# Altium PCB switch_v4.PcbDoc
Units mm, origin at the board's own origin, x right, y up, seen from the top; angles counter-clockwise.
Board outline 96 x 81 mm, 4 copper layers (Top Layer, Signal Layer 1, Signal Layer 2, Bottom Layer), stack 1.47 mm thick; 127 components, 94 nets, 434 pads, 936 vias.
Unrouted connection lines stored in the file: 1.
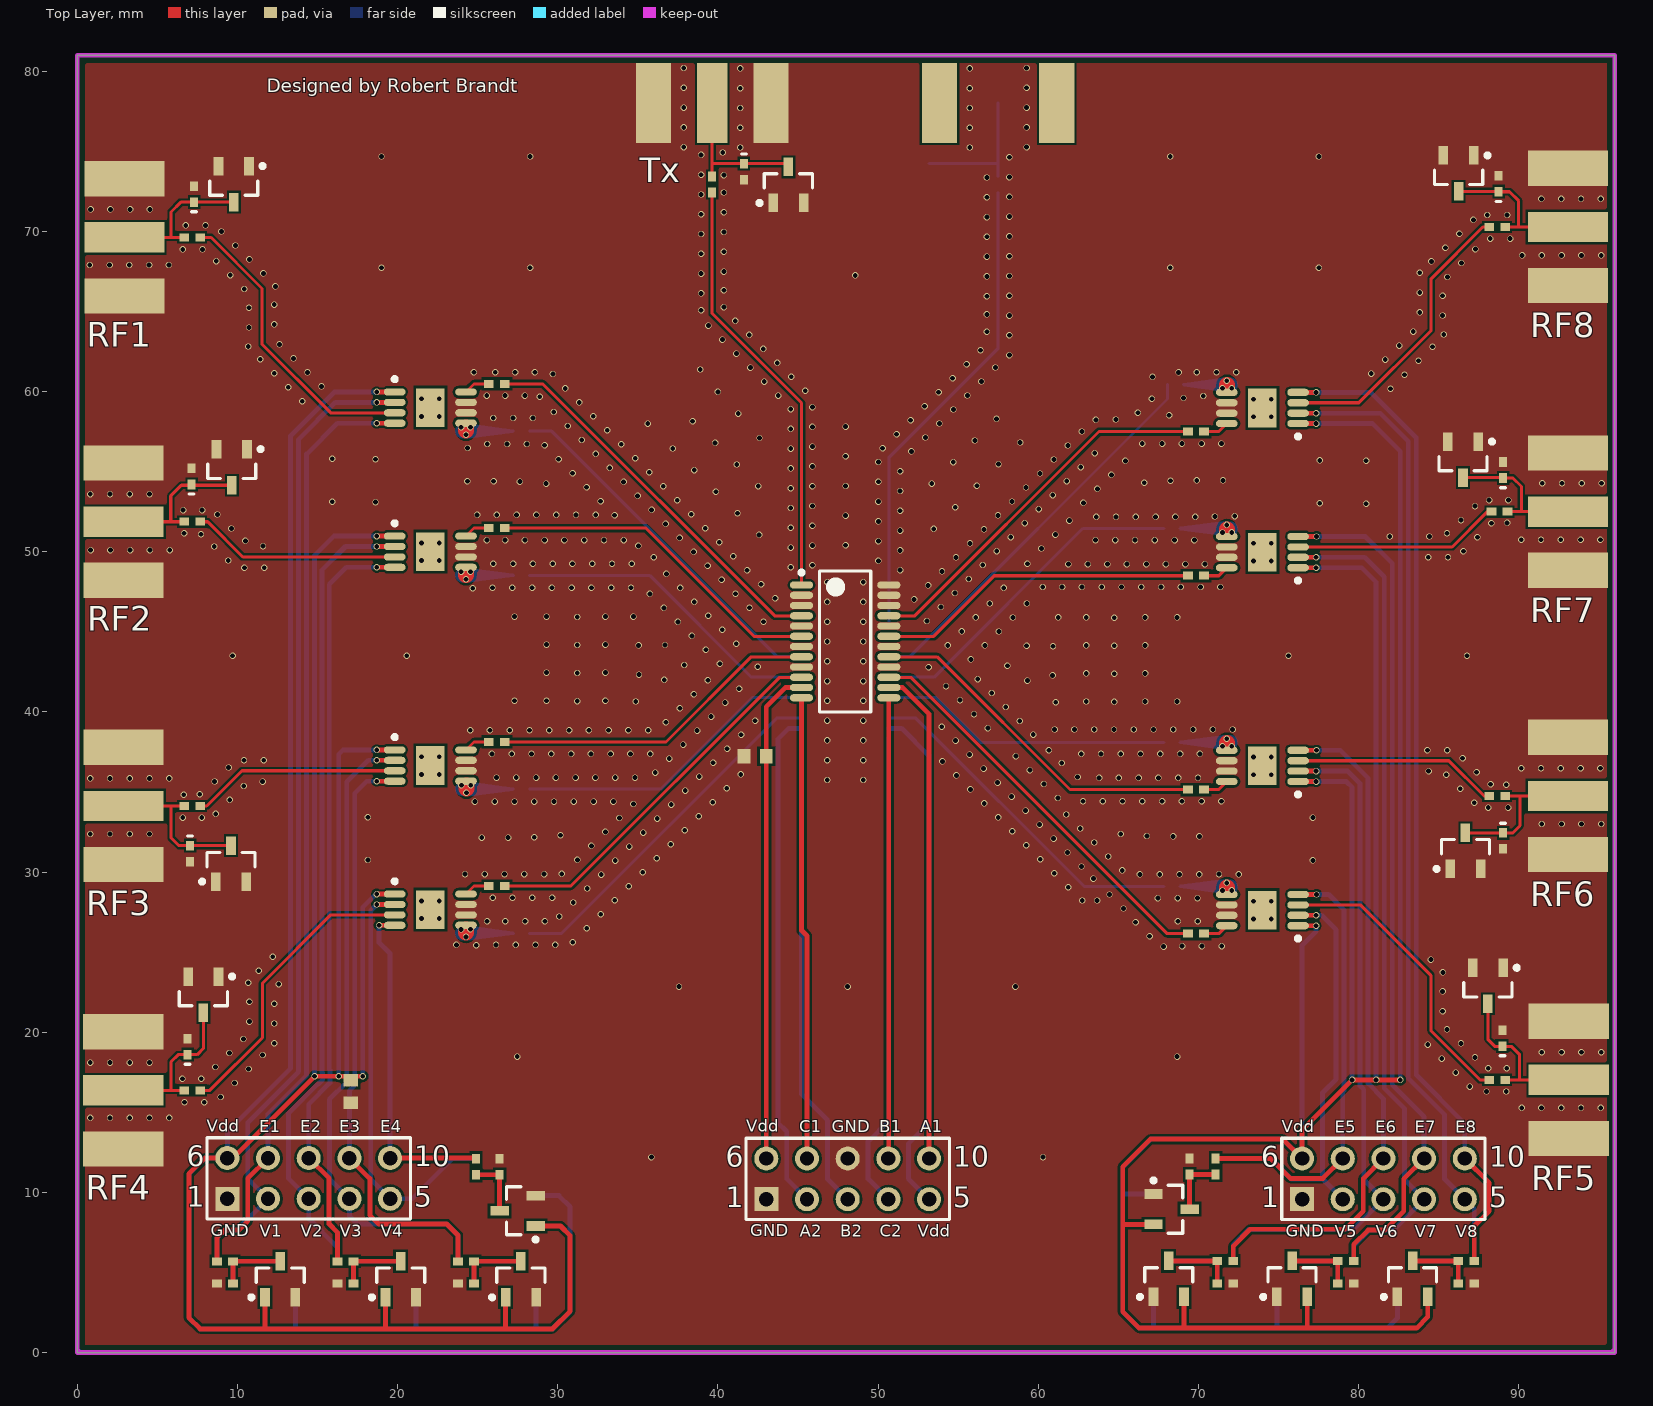
[diagram p0: Top Layer view]
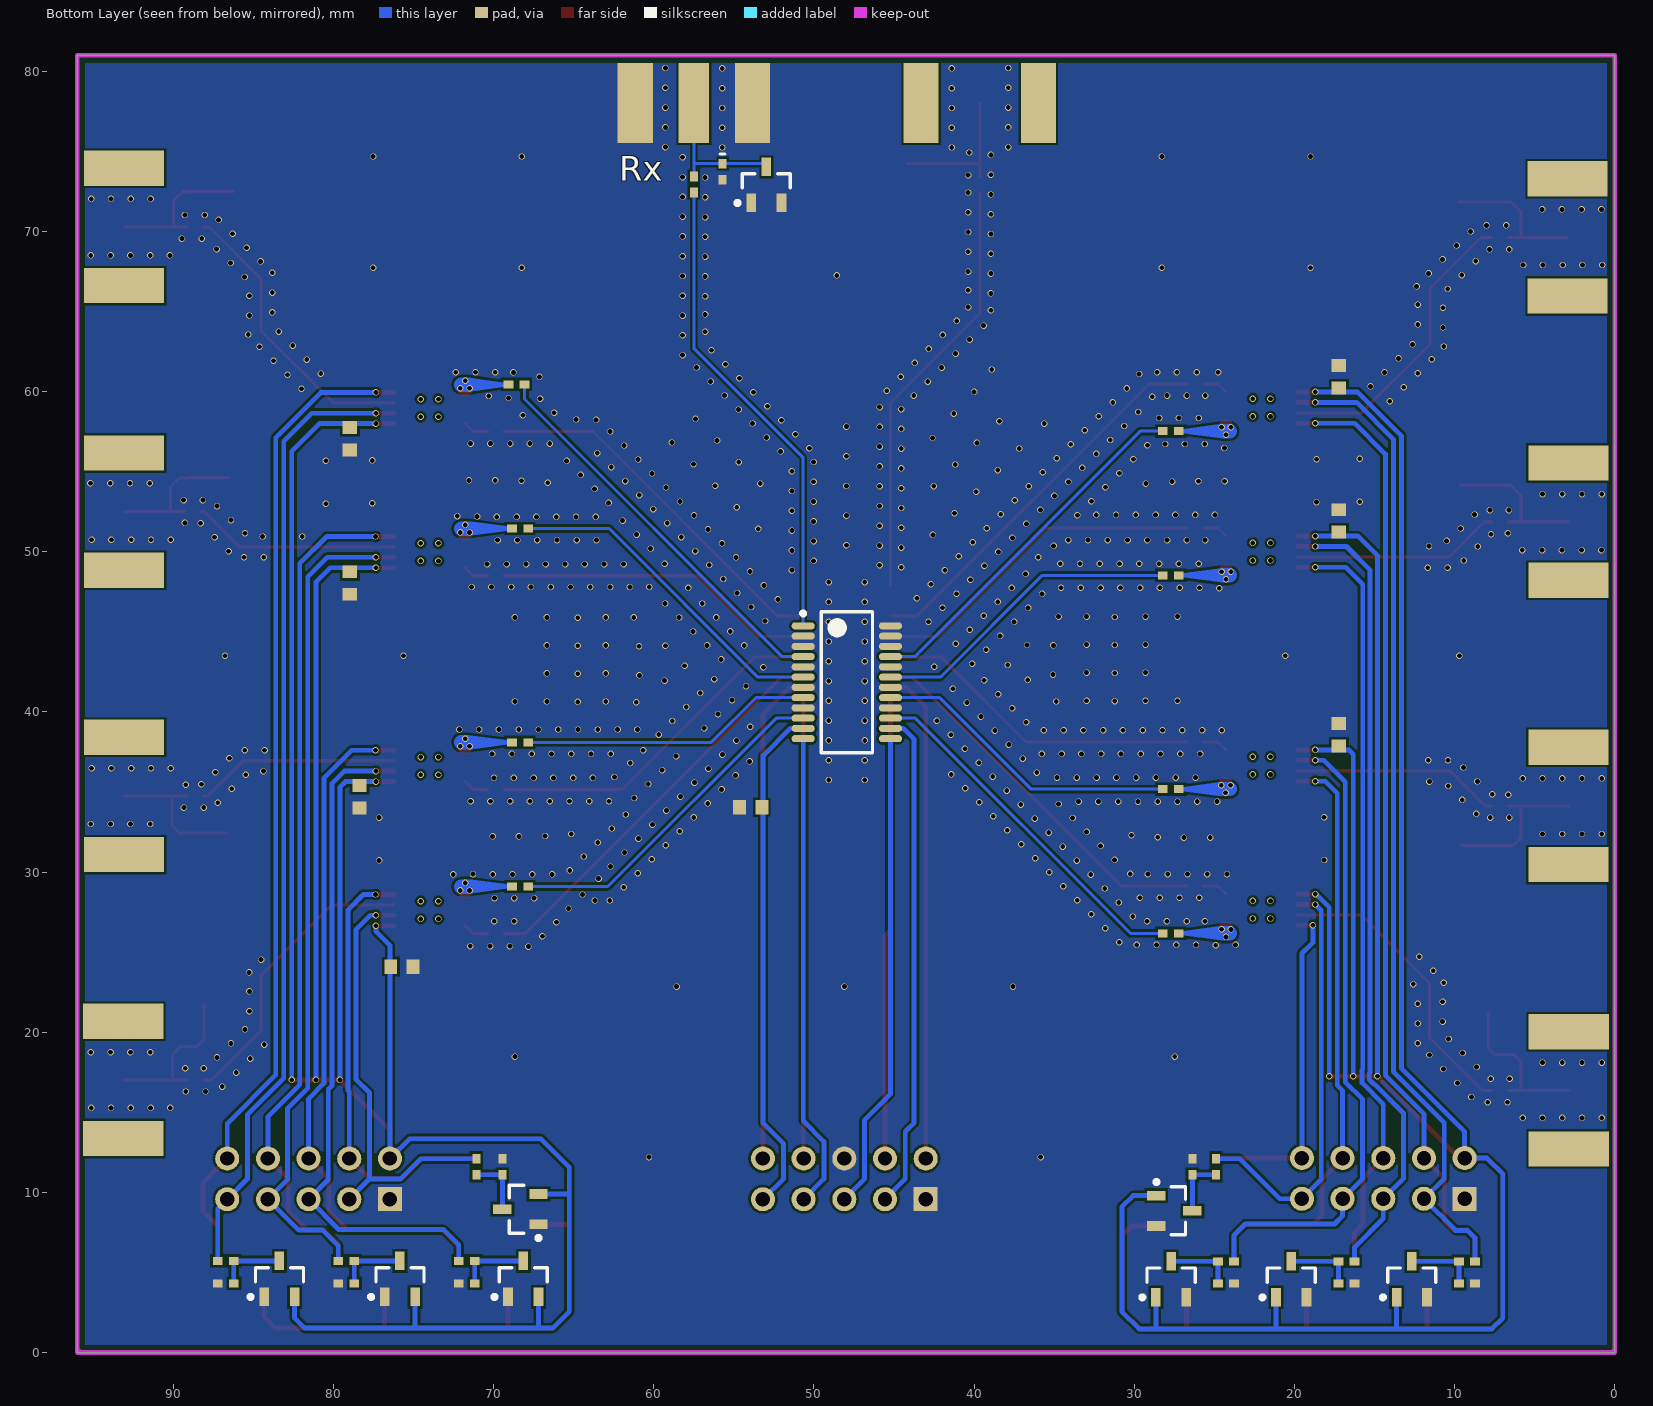
[diagram p1: Bottom Layer view, seen from below]
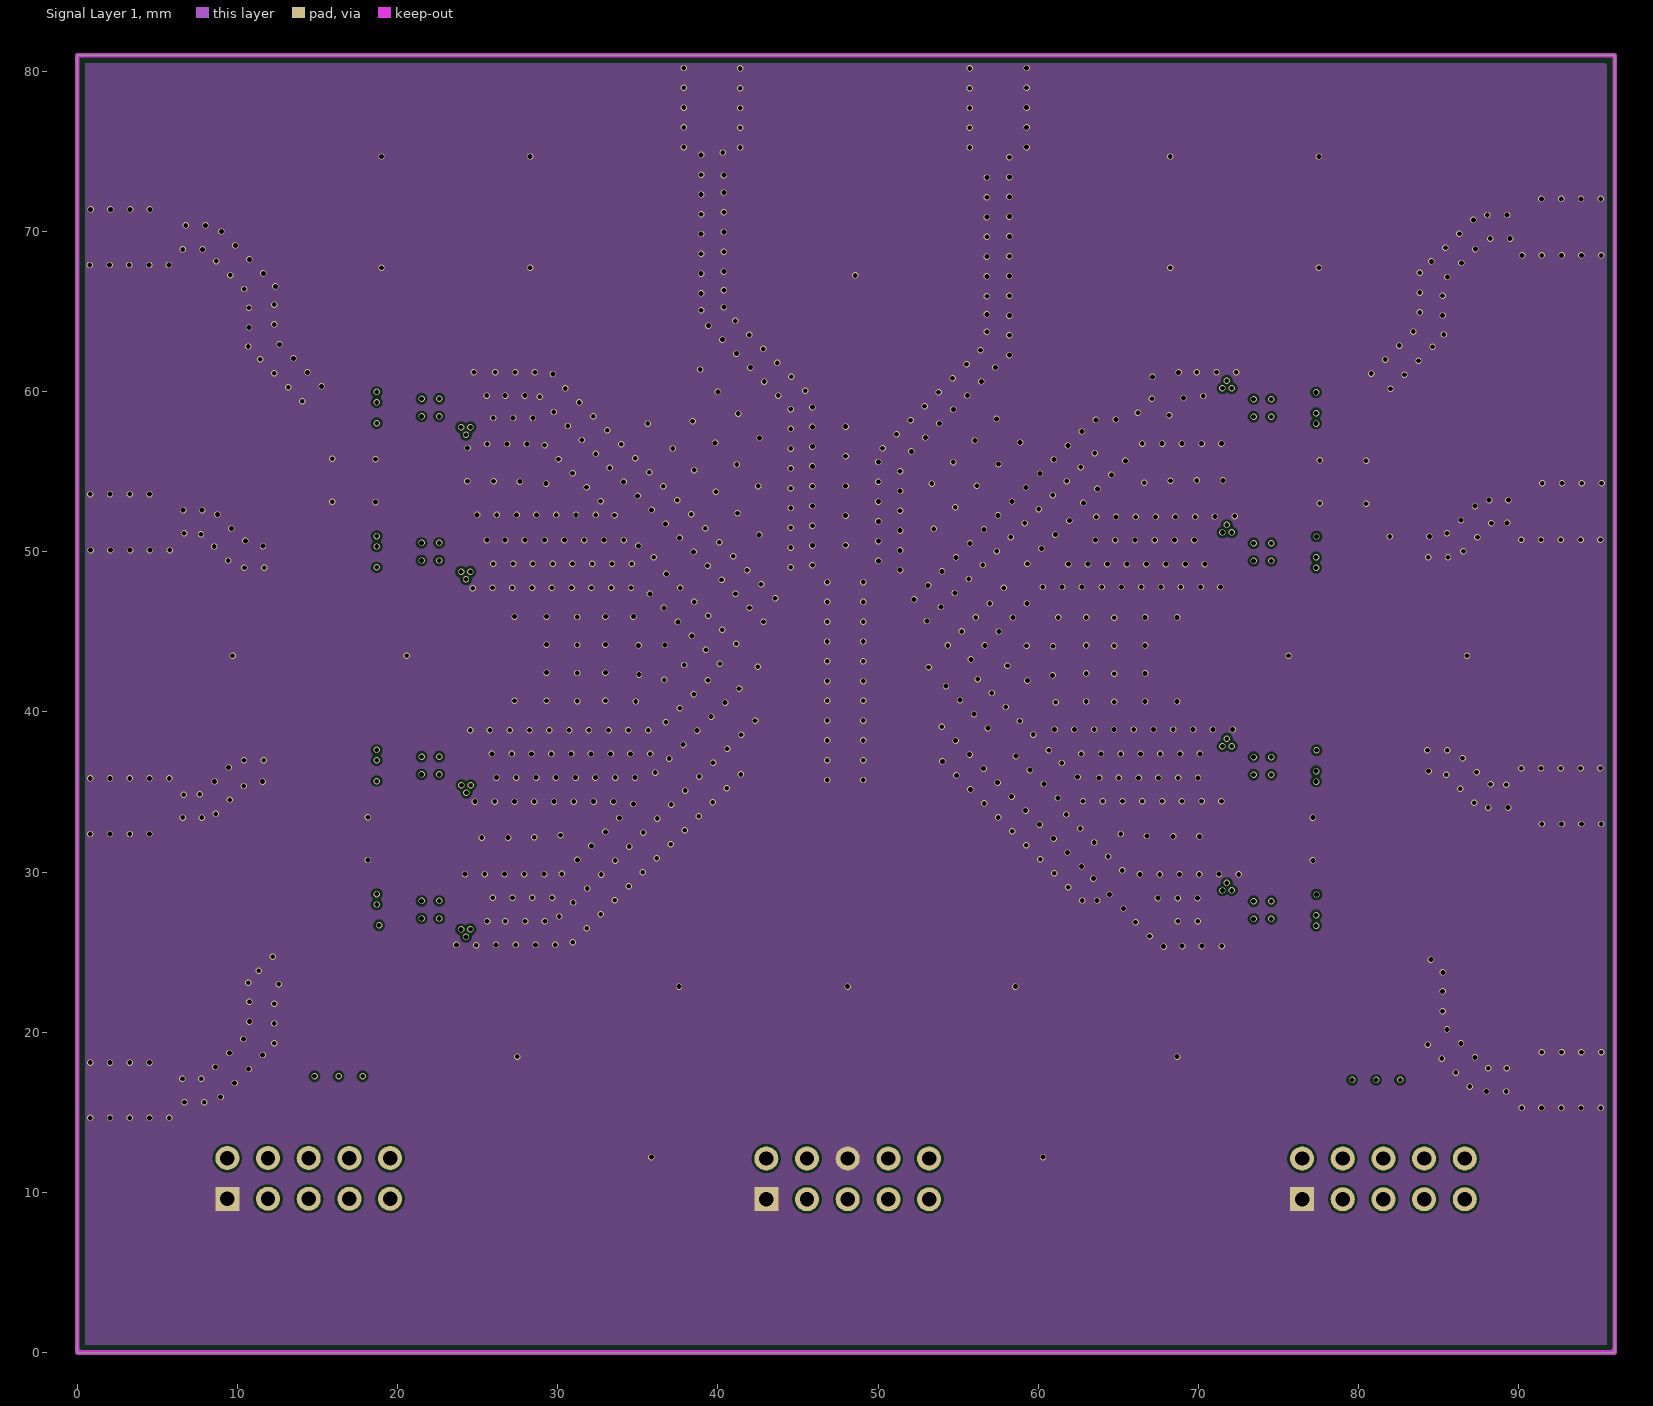
[diagram p2: Signal Layer 1]
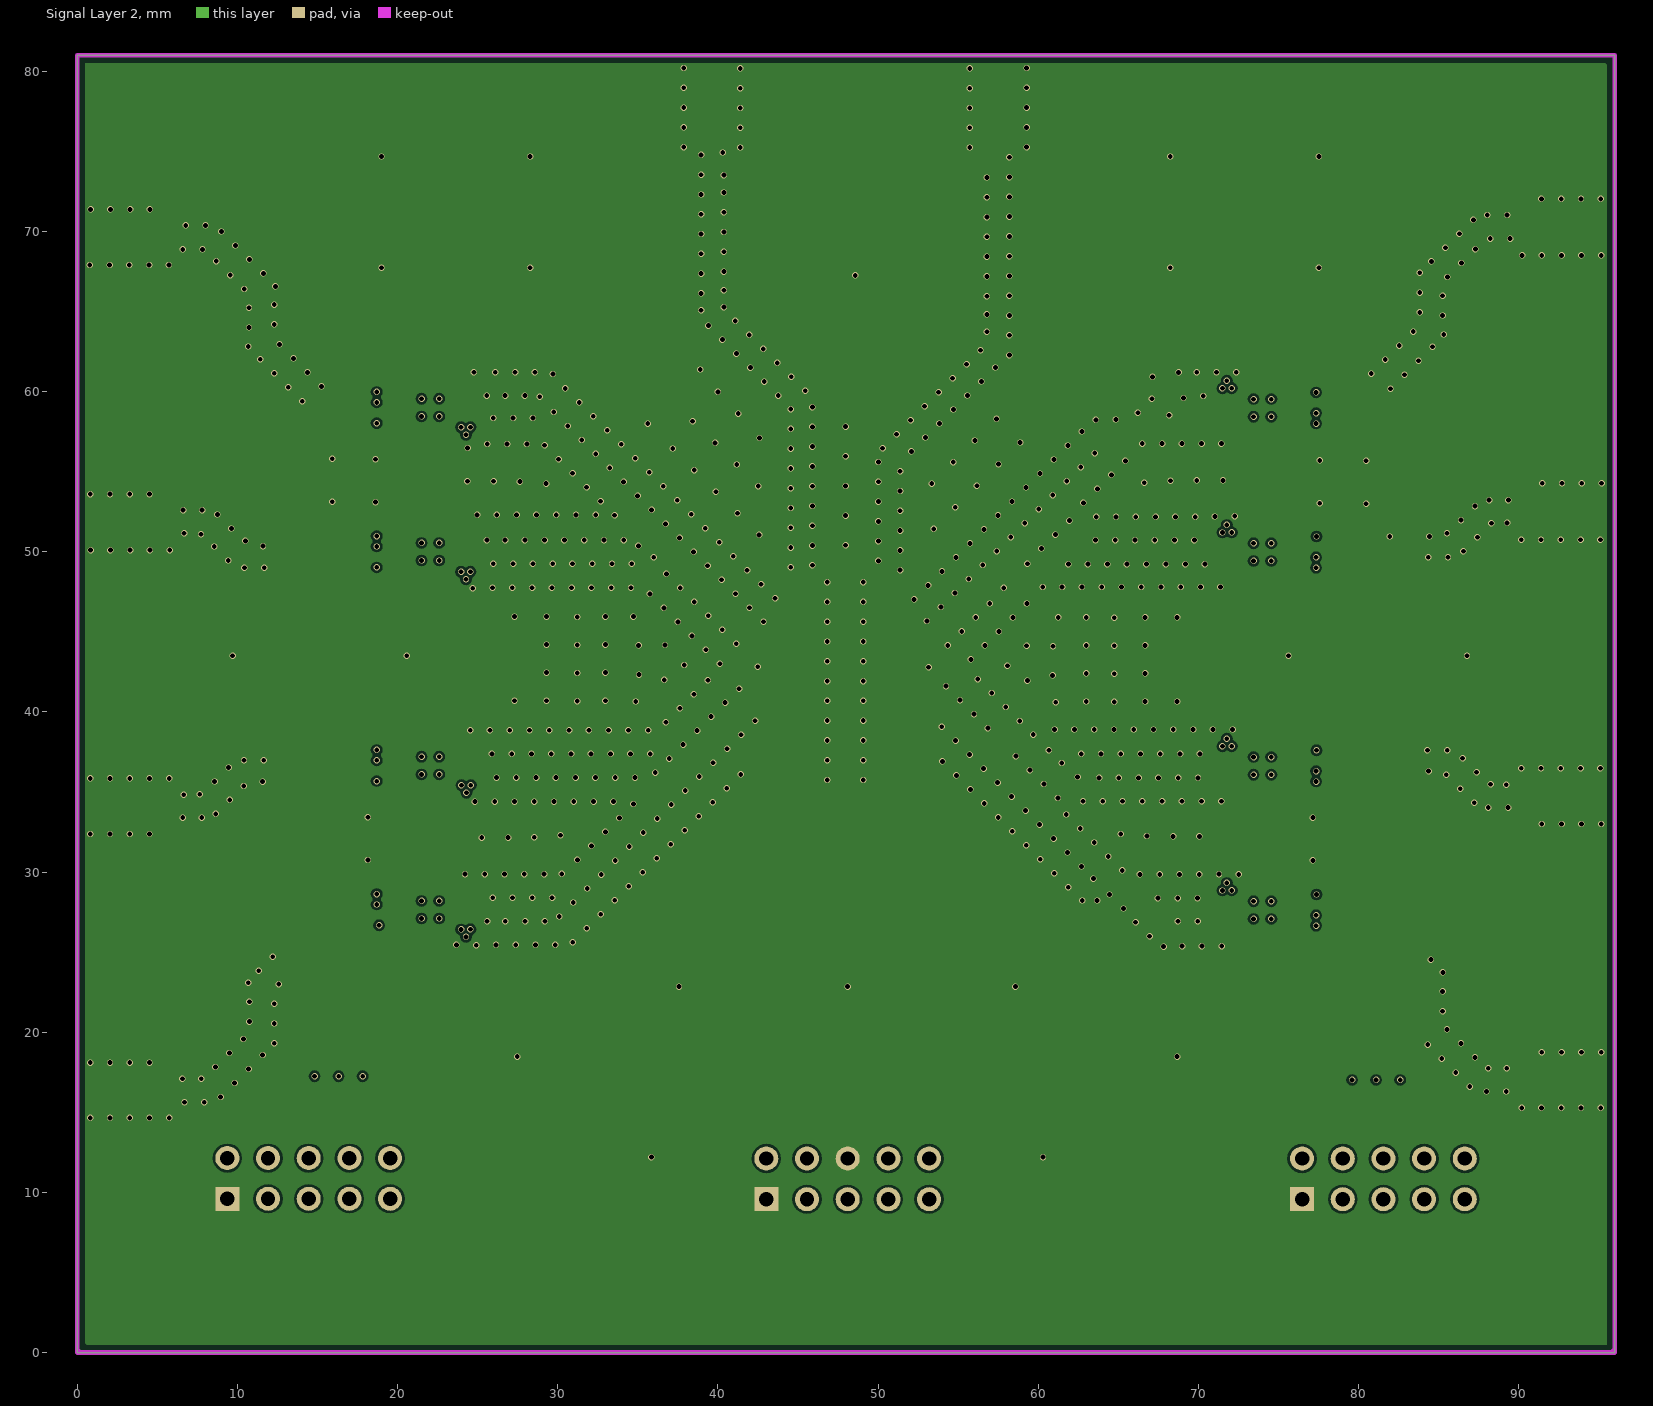
[diagram p3: Signal Layer 2]

## Layer stack, top to bottom
Top Solder: solder mask 0.0102, Solder Resist, Dk 3.5
Top Layer: signal copper 0.0356
Dielectric1: core 0.6, FR-4, Dk 4.2
Signal Layer 1: signal copper 0.036
Prepreg: prepreg 0.127, FR-4, Dk 4.2
Signal Layer 2: signal copper 0.036
Dielectric 3: core 0.6, FR-4, Dk 4.2
Bottom Layer: signal copper 0.0356
Bottom Solder: solder mask 0.0102, Solder Resist, Dk 3.5

## Board outline
0,0 0,81 96,81 96,0

## Design rules (kind name [scope] priority, off if disabled: settings)
Clearance [All] p1: gap=0.153
FabricationTestPointUsage TestPointUsage [All] p1: valid=0 allowmultiple=FALSE
FabricationTestpoint Testpoint [All] p1: side=3 testpointundercomponent=TRUE minsize=1.016 maxsize=2.54 preferedsize=1.524 minholesize=0 maxholesize=1.016 preferedholesize=0.813 testpointgrid=0.025 allowsidetop=TRUE allowsidebottom=TRUE usegrid=TRUE gridtolerance=0
PlaneClearance [All] p1: clearance=0.2
PolygonConnect [All] p1: connectstyle=Direct reliefconductorwidth=0.1 reliefentries=4 polygonreliefangle="90 Angle" airgapwidth=0.1
RoomDefinition switch_v2 [InNet() And OnLayer()] p1: confinementstyle=ConfineIn formatcopy=TRUE lockcomponents=FALSE outline -30.433,85.65 128.675,85.65 128.675,92.725 -30.433,92.725
RoutingVias [All] p1: holewidth=0.2 width=0.3 viastyle="Through Hole" minholewidth=0.2 minwidth=0.3 maxholewidth=0.2 maxwidth=0.3
SilkToSolderMaskClearance SilkscreenOverComponentPads [IsPad] p1: minsilkscreentomaskgap=0.254 clearancetoexposedcopper=TRUE
SolderMaskExpansion [All] p1: expansion=0.102
UnpouredPolygon [All] p1: allowunpoured=FALSE
Width [All] p1: maxlimit=0.19 minlimit=0.19 preferedwidth=0.19
25 further rules are at their usual default settings.

## Classes and differential pairs
component class switch_v2: RF1 RF2 RF3 RF4 RF5 RF6 RF7 RF8

## Components (designator, comment, footprint, x,y, rotation, side; value= is the part's Value field where it differs from the comment)
C1_A "Cap Semi" 0402 26.2,60.475 r0 top
C1_B "Cap Semi" 0402 68.575,60.45 r0 bottom
C1_C "Cap Semi" 0402 7.175,69.622 r0 top
C1_Vdd "Cap Semi" 1608[0603] 42.325,37.225 r0 top
C2_A "Cap Semi" 0402 26.2,51.475 r0 top
C2_B "Cap Semi" 0402 68.35,51.45 r0 bottom
C2_C "Cap Semi" 0402 7.175,51.872 r0 top
C2_Vdd "Cap Semi" 1608[0603] 53.95,34.05 r0 bottom
C3_A "Cap Semi" 0402 26.2,38.125 r0 top
C3_B "Cap Semi" 0402 68.35,38.1 r0 bottom
C3_C "Cap Semi" 0402 7.175,34.122 r0 top
C4_A "Cap Semi" 0402 26.2,29.125 r0 top
C4_B "Cap Semi" 0402 68.35,29.1 r0 bottom
C4_C "Cap Semi" 0402 7.175,16.372 r0 top
C5_A "Cap Semi" 0402 69.85,26.15 r0 top
C5_B "Cap Semi" 0402 27.725,26.175 r0 bottom
C5_C "Cap Semi" 0402 88.65,17.022 r0 top
C6_A "Cap Semi" 0402 69.85,35.15 r0 top
C6_B "Cap Semi" 0402 27.725,35.175 r0 bottom
C6_C "Cap Semi" 0402 88.65,34.747 r0 top
C7_A "Cap Semi" 0402 69.85,48.5 r0 top
C7_B "Cap Semi" 0402 27.725,48.525 r0 bottom
C7_C "Cap Semi" 0402 88.8,52.497 r0 top
C8_A "Cap Semi" 0402 69.85,57.5 r0 top
C8_B "Cap Semi" 0402 27.725,57.525 r0 bottom
C8_C "Cap Semi" 0402 88.65,70.272 r0 top
C_SP8T_1 "Cap Semi" 0402 39.647,72.925 r90 top
C_SP8T_2 "Cap Semi" 0402 57.5,72.925 r270 bottom
CA1_Vdd "Cap Semi" 1608[0603] 17.225,60.925 r90 bottom
CA2_Vdd "Cap Semi" 1608[0603] 17.225,51.925 r90 bottom
CA3_Vdd "Cap Semi" 1608[0603] 17.225,38.575 r90 bottom
CA4_Vdd "Cap Semi" 1608[0603] 17.075,16.3 r270 top
CA5_Vdd "Cap Semi" 1608[0603] 75.725,24.1 r0 bottom
CA6_Vdd "Cap Semi" 1608[0603] 78.375,34.7 r90 bottom
CA7_Vdd "Cap Semi" 1608[0603] 78.975,48.05 r90 bottom
CA8_Vdd "Cap Semi" 1608[0603] 78.975,57.05 r90 bottom
D1_EN "Diode" SOT-23_N 52.975,72.9 r90 bottom
D1_EN "Diode" SOT-23_N 44.4,72.9 r90 top
D1_EN "Diode" SOT-23_N 86.25,73.625 r270 top
D1_EN "Diode" SOT-23_N 86.525,55.75 r270 top
D1_EN "Diode" SOT-23_N 86.675,31.325 r90 top
D1_EN "Diode" SOT-23_N 88.075,22.9 r270 top
D1_EN "Diode" SOT-23_N 7.875,22.35 r270 top
D1_EN "Diode" SOT-23_N 9.6,30.525 r90 top
D1_EN "Diode" SOT-23_N 9.65,55.275 r270 top
D1_EN "Diode" SOT-23_N 12.675,4.575 r90 top
D1_EN "Diode" SOT-23_N 9.775,72.95 r270 top
D1_Vctl "Diode" SOT-23_N 12.675,4.575 r90 bottom
D2_EN "Diode" SOT-23_N 20.2,4.575 r90 top
D2_Vctl "Diode" SOT-23_N 20.2,4.575 r90 bottom
D3_EN "Diode" SOT-23_N 27.7,4.575 r90 top
D3_Vctl "Diode" SOT-23_N 27.7,4.575 r90 bottom
D4_EN "Diode" SOT-23_N 27.5,8.85 r180 top
D4_Vctl "Diode" SOT-23_N 27.5,8.85 r180 bottom
D5_EN "Diode" SOT-23_N 68.325,8.95 r0 top
D5_Vctl "Diode" SOT-23_N 68.325,8.95 r0 bottom
D6_EN "Diode" SOT-23_N 68.15,4.6 r90 top
D6_Vctl "Diode" SOT-23_N 68.15,4.6 r90 bottom
D7_EN "Diode" SOT-23_N 75.85,4.6 r90 top
D7_Vctl "Diode" SOT-23_N 75.85,4.6 r90 bottom
D8_EN "Diode" SOT-23_N 83.375,4.6 r90 top
D8_Vctl "Diode" SOT-23_N 83.375,4.6 r90 bottom
"R1_EN 133K" "" 0402 9.225,4.3 r0 top
"R1_EN 500" "" 0402 9.225,5.7 r180 top
"R1_Vctl 133K" "" 0402 9.225,4.3 r0 bottom
"R1_Vctl 500" "" 0402 9.225,5.7 r180 bottom
"R2 EN 133K" "" 0402 16.75,4.3 r0 top
"R2 EN 500" "" 0402 16.75,5.7 r180 top
"R2_Vctl 133K" "" 0402 16.75,4.3 r0 bottom
"R2_Vctl 500" "" 0402 16.75,5.7 r180 bottom
"R3 EN 133K" "" 0402 24.275,4.3 r0 top
"R3 EN 500" "" 0402 24.275,5.7 r180 top
"R3 Vctl 133K" "" 0402 24.275,4.3 r0 bottom
"R3 Vctl 500" "" 0402 24.275,5.7 r180 bottom
"R4 EN 133K" "" 0402 26.375,11.6 r270 top
"R4 EN 500" "" 0402 24.9,11.6 r90 top
"R4 Vctl 133K" "" 0402 26.375,11.6 r270 bottom
"R4 Vctl 500" "" 0402 24.9,11.6 r90 bottom
"R5 EN 133K" "" 0402 69.45,11.615 r90 top
"R5 EN 500" "" 0402 71.075,11.615 r270 top
"R5 Vctl 133K" "" 0402 69.45,11.6 r90 bottom
"R5 Vctl 500" "" 0402 71.075,11.6 r270 bottom
"R6 EN 133K" "" 0402 71.675,4.325 r0 top
"R6 EN 500" "" 0402 71.675,5.725 r180 top
"R6 Vctl 133K" "" 0402 71.675,4.325 r0 bottom
"R6 Vctl 500" "" 0402 71.675,5.725 r180 bottom
"R7 EN 133K" "" 0402 79.2,4.325 r0 top
"R7 EN 500" "" 0402 79.2,5.725 r180 top
"R7 Vctl 133K" "" 0402 79.2,4.325 r0 bottom
"R7 Vctl 500" "" 0402 79.2,5.725 r180 bottom
"R8 1_EN 133K" "" 0402 86.725,4.325 r0 top
"R8 EN 500" "" 0402 86.725,5.725 r180 top
"R8 Vctl 133K" "" 0402 86.725,4.325 r0 bottom
"R8 Vctl 500" "" 0402 86.725,5.725 r180 bottom
RF1 "J502-ND" J502-ND 2.952,69.625 r90 top
RF2 "J502-ND" J502-ND 2.902,51.875 r90 top
RF3 "J502-ND" J502-ND 2.902,34.125 r90 top
RF4 "J502-ND" J502-ND 2.875,16.375 r90 top
RF5 "J502-ND" J502-ND 93.123,17.025 r90 top
RF6 "J502-ND" J502-ND 93.073,34.75 r90 top
RF7 "J502-ND" J502-ND 93.073,52.5 r90 top
RF8 "J502-ND" J502-ND 93.073,70.275 r90 top
Rx "J502-ND" J502-ND 57.5,78.024 r0 bottom (schematic designator RFc2)
"SP8T control" "Header 5X2A" HDR2X5_CEN 43.025,9.575 r0 top
SP8T_1 "SP8T" SP8T 47.95,44.4 r0 top
SP8T_2 "SP8T" SP8T 47.95,41.85 r180 bottom
"SPDT control 1" "Header 5X2A" HDR2X5_CEN 9.375,9.6 r0 top
"SPDT control 2" "Header 5X2A" HDR2X5_CEN 76.475,9.575 r0 top
SPDT_1 "SPDT" SPDT 22.05,59 r0 top
SPDT_2 "SPDT" SPDT 22.05,50 r0 top
SPDT_3 "SPDT" SPDT 22.05,36.65 r0 top
SPDT_4 "SPDT" SPDT 22.05,27.65 r0 top
SPDT_5 "SPDT" SPDT 74,27.625 r180 top
SPDT_6 "SPDT" SPDT 74,36.625 r180 top
SPDT_7 "SPDT" SPDT 74,49.975 r180 top
SPDT_8 "SPDT" SPDT 74,58.975 r180 top
Tx "J502-ND" J502-ND 39.65,78.024 r0 top (schematic designator RFc1)
? "Comment" 0402-A 55.7,73.725 r270 bottom
? "Comment" 0402-A 41.625,73.725 r270 top
? "Comment" 0402-A 88.75,72.975 r90 top
? "Comment" 0402-A 89.025,55.1 r90 top
? "Comment" 0402-A 89.025,31.95 r270 top
? "Comment" 0402-A 88.975,19.625 r90 top
? "Comment" 0402-A 6.9,19.1 r90 top
? "Comment" 0402-A 7.05,31.15 r270 top
? "Comment" 0402-A 7.15,54.7 r90 top
? "Comment" 0402-A 7.3,72.325 r90 top

## Footprints (in the part's own frame and the unit in brackets; to place one, negate y for a bottom-side part, rotate by r counter-clockwise, add the part's x,y. Pads: shape width x height; smd on the part's side, far side on the other; paste and mask are expansions set on the pad)
0402 [mm] "Chip Capacitor, Body 1.0x0.5mm, IPC High Density"
  rect 0.6x0.5 smd: 1(-0.5,0) 2(0.5,0)
  body extent -0.55,-0.3 0.55,0.3, height 1.3
0402-A [mm] "Chip Inductor, Body 1.0x0.5mm, IPC High Density"
  rect 0.6x0.5 smd: 1(-0.5,0) 2(0.5,0)
  silkscreen extent -1.1,-0.15 -1.1,0.15, body extent -0.55,-0.3 0.55,0.3, height 0.55
1608[0603] [mm] "Chip Capacitor, Body 1.6x0.8mm, IPC High Density"
  rect 0.8x0.9 smd: 1(-0.7,0) 2(0.7,0)
  body extent -0.87,-0.48 0.87,0.48, height 1.3
HDR2X5_CEN [mm] "Connector; Header; 5x2 Position"
  rect 1.5x1.5 hole 0.9: 1(0,0)
  round 1.5 hole 0.9: 2(2.54,0) 3(5.08,0) 4(7.62,0) 5(10.16,0) 6(0,2.54) 7(2.54,2.54) 8(5.08,2.54) 9(7.62,2.54) 10(10.16,2.54)
  silkscreen extent -1.27,-1.27 11.43,3.81
J502-ND [mm]
  rect 1.9x5 smd: 1(-0.003,0)
  rect 2.2x5 smd: 2(-3.661,0) 3(3.661,0)
  rect 2.2x5 smd far side: 4(-3.661,0) 5(3.661,0)
SOT-23_N [mm] "SOT23, 3-Leads, Body 2.9x1.3mm, Pitch 0.95mm, Lead Span 2.5mm, IPC Medium Density"
  rect 1.15x0.6 smd: 1(-1.125,0.95) 2(-1.125,-0.95) 3(1.125,0)
  silkscreen extent -1.25,-1.5 0.7,1.93, body extent -0.7,-1.5 0.7,1.5, height 1.1
SP8T [mm] "SOP, 24-Leads, Body 8.65x3.90mm, Pitch 0.64mm, IPC Medium Density"
  oval 1.45x0.45 smd: 1(-2.725,3.52) 2(-2.725,2.88) 3(-2.725,2.24) 4(-2.725,1.6) 5(-2.725,0.96) 6(-2.725,0.32) 7(-2.725,-0.32) 8(-2.725,-0.96) 9(-2.725,-1.6) 10(-2.725,-2.24) 11(-2.725,-2.88) 12(-2.725,-3.52) 13(2.725,-3.52) 14(2.725,-2.88) 15(2.725,-2.24) 16(2.725,-1.6) 17(2.725,-0.96) 18(2.725,-0.32) 19(2.725,0.32) 20(2.725,0.96) 21(2.725,1.6) 22(2.725,2.24) 23(2.725,2.88) 24(2.725,3.52)
  silkscreen extent -2.85,-4.4 1.6,4.42
SPDT [mm] "SPDT"
  oval 1.35x0.45 smd: 1(-2.225,0.975) 2(-2.225,0.325) 3(-2.225,-0.325) 4(-2.225,-0.975) 5(2.225,-0.975) 6(2.225,-0.325) 7(2.225,0.325) 8(2.225,0.975)
  rect 1.78x2.41 smd: 9(0,0)
  silkscreen extent -2.35,1.65 -2.1,1.9

## Part data
C1_A C1_B C1_C C1_Vdd C2_A C2_B C2_C C2_Vdd C3_A C3_B C3_C C4_A C4_B C4_C C5_A C5_B C5_C C6_A C6_B C6_C C7_A C7_B C7_C C8_A C8_B C8_C C_SP8T_1 C_SP8T_2 CA1_Vdd CA2_Vdd CA3_Vdd CA4_Vdd CA5_Vdd CA6_Vdd CA7_Vdd CA8_Vdd: "Capacitor (Semiconductor SIM Model)"
"R1_EN 133K" "R1_EN 500" "R1_Vctl 133K" "R1_Vctl 500" "R2 EN 133K" "R2 EN 500" "R2_Vctl 133K" "R2_Vctl 500" "R3 EN 133K" "R3 EN 500" "R3 Vctl 133K" "R3 Vctl 500" "R4 EN 133K" "R4 EN 500" "R4 Vctl 133K" "R4 Vctl 500" "R5 EN 133K" "R5 EN 500" "R5 Vctl 133K" "R5 Vctl 500" "R6 EN 133K" "R6 EN 500" "R6 Vctl 133K" "R6 Vctl 500" "R7 EN 133K" "R7 EN 500" "R7 Vctl 133K" "R7 Vctl 500" "R8 1_EN 133K" "R8 EN 500" "R8 Vctl 133K" "R8 Vctl 500": library part Res1, "Resistor"
"SP8T control" "SPDT control 1" "SPDT control 2": "Header, 5-Pin, Dual row"
? ? ? ? ? ? ? ? ? ?: library part Inductor

## Via types
v1: diameter 0.4, hole 0.3, Top Layer to Bottom Layer, 936 vias

## Nets (pads, with @x,y where several pads share a name; then routed paths per layer and width w, separated by ;. In a path a pad name is that pad's centre, name@x,y a point inside that pad or via, vN(x,y) a via of type N, cw(c..) or ccw(c..) an arc to the next point about the centre after c; other vN are vias at no path point)
GND: "R1_EN 133K.1" "R1_Vctl 133K.1" "R2 EN 133K.1" "R2_Vctl 133K.1" "R3 EN 133K.1" "R3 Vctl 133K.1" "R4 EN 133K.1" "R4 Vctl 133K.1" "R5 EN 133K.2" "R5 Vctl 133K.2" "R6 EN 133K.2" "R6 Vctl 133K.2" "R7 EN 133K.2" "R7 Vctl 133K.2" "R8 1_EN 133K.2" "R8 Vctl 133K.2" "SP8T control.1" "SP8T control.8" "SPDT control 1.1" "SPDT control 2.1" ?.2 C1_Vdd.1 C2_Vdd.2 CA1_Vdd.2 CA2_Vdd.2 CA3_Vdd.2 CA4_Vdd.2 CA5_Vdd.1 CA6_Vdd.1 CA7_Vdd.1 CA8_Vdd.1 D1_EN.1@8.65,29.4 D1_EN.1@8.825,23.475 D1_EN.1@10.6,56.4 D1_EN.1@10.725,74.075 D1_EN.1@43.45,71.775 D1_EN.1@53.925,71.775 D1_EN.1@85.725,30.2 D1_EN.1@87.2,74.75 D1_EN.1@87.475,56.875 D1_EN.1@89.025,24.025 D1_EN.2 D1_Vctl.2 D2_EN.2 D2_Vctl.2 D3_EN.2 D3_Vctl.2 D4_EN.2 D4_Vctl.2 D5_EN.1 D5_Vctl.1 D6_EN.1 D6_Vctl.1 D7_EN.1 D7_Vctl.1 D8_EN.1 D8_Vctl.1 RF1.2 RF1.3 RF2.2 RF2.3 RF3.2 RF3.3 RF4.2 RF4.3 RF5.2 RF5.3 RF6.2 RF6.3 RF7.2 RF7.3 RF8.2 RF8.3 Rx.2 Rx.3 SP8T_1.2 SP8T_1.3 SP8T_1.5 SP8T_1.7 SP8T_1.9 SP8T_1.16 SP8T_1.18 SP8T_1.20 SP8T_1.22 SP8T_1.23 SP8T_1.24 SP8T_2.2 SP8T_2.3 SP8T_2.5 SP8T_2.7 SP8T_2.9 SP8T_2.16 SP8T_2.18 SP8T_2.20 SP8T_2.22 SP8T_2.23 SP8T_2.24 SPDT_1.6 SPDT_1.7 SPDT_2.6 SPDT_2.7 SPDT_3.6 SPDT_3.7 SPDT_4.6 SPDT_4.7 SPDT_5.6 SPDT_5.7 SPDT_6.6 SPDT_6.7 SPDT_7.6 SPDT_7.7 SPDT_8.6 SPDT_8.7 Tx.2 Tx.3
  other v1: 35.85,12.2 60.3,12.2 0.81,14.65 2.045,14.65 3.28,14.65 4.515,14.65 5.75,14.65 90.185,15.275 91.42,15.275 92.655,15.275 93.89,15.275 95.125,15.275 6.7,15.625 7.935,15.625 8.955,15.955 87.99,16.3 89.225,16.3 86.945,16.605 9.828,16.828 6.565,17.1 7.75,17.1 86.072,17.478 10.702,17.702 88.1,17.75 89.26,17.75 8.628,17.828 0.81,18.1 2.045,18.1 3.28,18.1 4.515,18.1 85.198,18.352 87.272,18.428 27.475,18.475 68.675,18.475 11.575,18.575 9.502,18.702 91.445,18.75 92.68,18.75 93.915,18.75 95.15,18.75 84.325,19.225 12.3,19.31 86.398,19.302 10.375,19.575 85.525,20.175 12.3,20.545 10.75,20.665 85.25,21.315 12.3,21.78 10.75,21.9 85.25,22.55 37.575,22.85 48.1,22.85 58.575,22.85 12.582,23.007 10.685,23.085 85.265,23.735 11.334,23.834 84.516,24.534 12.207,24.707 67.827,25.348 68.985,25.375 70.22,25.375 71.455,25.375 24.91,25.425 23.675,25.45 26.145,25.45 27.38,25.45 28.615,25.45 29.85,25.45 30.946,25.621 66.953,25.997 31.819,26.494 66.08,26.87 25.595,26.925 26.73,26.925 27.965,26.925 29.2,26.925 68.725,26.925 69.96,26.925 30.099,27.224 32.692,27.367 65.325,27.725 30.972,28.097 62.75,28.225 63.675,28.225 33.566,28.241 67.475,28.375 68.71,28.375 69.945,28.375 25.945,28.4 27.18,28.4 28.415,28.4 29.65,28.4 64.452,28.598 31.846,28.971 61.877,29.048 34.439,29.114 63.444,29.59 32.719,29.844 66.35,29.85 67.585,29.85 68.82,29.85 70.055,29.85 72.525,29.85 24.21,29.875 25.445,29.875 26.68,29.875 27.915,29.875 29.15,29.875 71.29,29.875 30.259,29.884 61.003,29.922 35.312,29.987 65.25,30.1 62.705,30.345 33.592,30.717 77.15,30.725 18.15,30.75 31.232,30.757 60.13,30.795 36.185,30.86 64.377,30.973 61.832,31.218 34.466,31.591 32.105,31.63 59.257,31.668 37.059,31.734 63.503,31.847 60.959,32.091 25.263,32.15 26.9,32.15 28.538,32.175 68.425,32.225 70.063,32.225 66.788,32.25 30.175,32.3 0.81,32.375 2.045,32.375 3.28,32.375 4.515,32.375 65.15,32.375 35.339,32.464 32.978,32.503 58.384,32.541 37.932,32.607 62.63,32.72 60.085,32.965 91.445,33 92.68,33 93.915,33 95.15,33 36.212,33.337 33.852,33.377 6.59,33.4 7.775,33.4 77.15,33.4 18.15,33.425 57.51,33.415 38.805,33.48 61.757,33.593 8.653,33.628 59.212,33.838 88.1,34.025 89.335,34.025 37.085,34.21 34.725,34.25 56.637,34.288 39.678,34.353 87.222,34.328 24.83,34.4 26.065,34.4 27.3,34.4 28.535,34.4 29.77,34.4 31.005,34.4 32.24,34.4 33.475,34.4 62.795,34.425 64.03,34.425 65.265,34.425 66.5,34.425 67.735,34.425 68.97,34.425 70.205,34.425 71.44,34.425 9.527,34.502 61.228,34.622 58.339,34.711 6.65,34.825 7.653,34.853 37.959,35.084 55.764,35.161 86.348,35.202 40.552,35.227 10.4,35.375 89.225,35.45 60.355,35.495 88.247,35.478 57.466,35.584 8.577,35.652 11.575,35.65 46.825,35.75 49.075,35.75 0.81,35.85 2.045,35.85 3.28,35.85 4.515,35.85 5.75,35.85 63.8,35.875 65.035,35.875 66.27,35.875 67.505,35.875 68.74,35.875 69.975,35.875 26.18,35.9 27.415,35.9 28.65,35.9 29.885,35.9 31.12,35.9 32.355,35.9 33.59,35.9 34.825,35.9 62.463,35.937 38.832,35.957 54.891,36.034 85.475,36.075 41.425,36.1 36.085,36.21 87.373,36.227 84.375,36.3 59.482,36.368 56.592,36.458 90.16,36.475 91.395,36.475 92.63,36.475 93.865,36.475 95.1,36.475 9.45,36.525 61.465,36.81 39.705,36.83 54.017,36.908 10.415,36.975 11.65,36.975 46.825,36.985 49.075,36.985 36.959,37.084 86.5,37.1 58.609,37.241 55.719,37.331 25.895,37.375 27.13,37.375 28.365,37.375 29.6,37.375 30.835,37.375 32.07,37.375 33.305,37.375 34.54,37.375 35.775,37.375 62.685,37.375 63.92,37.375 65.155,37.375 66.39,37.375 67.625,37.375 68.86,37.375 70.095,37.375 84.3,37.6 85.535,37.6 60.666,37.609 40.578,37.703 37.832,37.957 54.846,38.204 46.825,38.22 49.075,38.22 41.452,38.577 59.693,38.582 38.705,38.83 24.535,38.85 25.77,38.85 27.005,38.85 28.24,38.85 29.475,38.85 30.71,38.85 31.945,38.85 33.18,38.85 34.415,38.85 35.65,38.85 61.025,38.9 62.26,38.9 63.495,38.9 64.73,38.9 65.965,38.9 67.2,38.9 68.435,38.9 69.67,38.9 70.905,38.9 72.14,38.9 56.862,38.988 53.972,39.078 36.755,39.355 58.845,39.43 42.325,39.45 46.825,39.455 49.075,39.455 39.578,39.703 55.989,39.861 37.628,40.228 57.972,40.303 40.452,40.577 61.1,40.6 64.75,40.625 34.875,40.65 63,40.65 66.675,40.65 68.675,40.65 31.225,40.675 27.3,40.7 29.3,40.7 32.975,40.7 46.825,40.69 49.075,40.69 55.116,40.734 38.502,41.102 57.098,41.177 41.325,41.45 54.242,41.608 46.825,41.925 49.075,41.925 59.325,41.95 39.375,41.975 36.65,42 56.225,42.05 60.9,42.275 35.075,42.325 64.75,42.375 63,42.4 66.675,42.4 31.225,42.425 29.3,42.45 32.975,42.45 53.159,42.791 42.486,42.813 58.075,42.875 37.9,42.925 40.125,43 46.825,43.16 49.075,43.16 55.8,43.275 9.7,43.5 20.575,43.5 75.625,43.5 86.775,43.5 39.252,43.873 60.925,44.1 59.275,44.125 64.75,44.125 35.05,44.15 54.35,44.15 56.673,44.148 63,44.15 66.675,44.15 31.225,44.175 36.7,44.175 29.3,44.2 32.975,44.2 41.15,44.25 46.825,44.395 49.075,44.395 38.378,44.747 55.223,45.023 57.547,45.022 40.277,45.123 37.505,45.62 42.85,45.625 46.825,45.63 49.075,45.63 53.05,45.675 64.75,45.875 56.097,45.897 58.42,45.895 61.25,45.9 63,45.9 66.675,45.9 68.675,45.9 31.225,45.925 27.3,45.95 29.3,45.95 32.975,45.95 34.725,45.95 39.403,45.997 36.632,46.493 41.977,46.498 53.923,46.548 56.97,46.77 59.293,46.768 38.53,46.87 46.825,46.865 49.075,46.865 52.25,47.025 43.575,47.1 35.759,47.366 41.103,47.372 54.797,47.422 24.695,47.725 25.93,47.75 27.165,47.75 28.4,47.75 29.635,47.75 30.87,47.75 32.105,47.75 33.34,47.75 34.575,47.75 37.657,47.743 57.843,47.743 60.285,47.8 61.495,47.8 62.73,47.8 63.965,47.8 65.2,47.8 66.435,47.8 67.67,47.8 68.905,47.8 70.14,47.8 71.375,47.8 53.123,47.898 42.702,47.973 46.825,48.1 49.075,48.1 40.23,48.245 55.67,48.295 36.784,48.616 53.997,48.772 41.828,48.847 51.375,48.85 10.44,49 11.675,49 44.55,49.025 39.357,49.118 45.9,49.15 56.543,49.168 61.885,49.225 63.102,49.225 64.319,49.225 65.536,49.225 66.754,49.225 67.971,49.225 69.188,49.225 70.405,49.225 25.98,49.25 27.215,49.25 28.45,49.25 29.685,49.25 30.92,49.25 32.155,49.25 33.39,49.25 34.625,49.25 59.325,49.25 50.025,49.425 9.425,49.45 36,49.65 54.87,49.645 84.35,49.65 85.585,49.65 40.955,49.72 38.484,49.991 86.55,50.025 57.416,50.041 0.835,50.1 2.07,50.1 3.305,50.1 4.54,50.1 5.775,50.1 51.375,50.085 60.198,50.198 44.55,50.26 8.552,50.323 11.6,50.35 35.037,50.363 45.9,50.385 47.975,50.4 55.743,50.518 40.082,50.593 50.025,50.66 10.5,50.675 25.58,50.725 26.715,50.725 27.95,50.725 29.185,50.725 30.42,50.725 31.655,50.725 32.89,50.725 34.125,50.725 63.575,50.725 64.81,50.725 66.045,50.725 67.28,50.725 68.515,50.725 69.75,50.725 90.16,50.75 91.395,50.75 92.63,50.75 93.865,50.75 95.1,50.75 37.61,50.865 87.423,50.898 58.29,50.915 81.955,50.95 84.425,50.95 42.575,51.05 61.072,51.072 7.728,51.097 6.675,51.15 85.525,51.15 51.375,51.32 56.616,51.391 53.475,51.425 9.627,51.448 39.209,51.466 44.55,51.495 45.9,51.62 36.737,51.738 88.297,51.772 59.163,51.788 89.275,51.8 50.025,51.895 61.945,51.945 86.398,51.973 63.625,52.175 64.86,52.175 66.095,52.175 67.33,52.175 68.565,52.175 69.8,52.175 71.035,52.2 72.27,52.225 47.975,52.252 33.55,52.275 57.49,52.265 24.965,52.3 26.2,52.3 27.435,52.3 28.67,52.3 29.905,52.3 31.14,52.3 32.375,52.3 8.753,52.322 38.335,52.34 41.227,52.398 51.375,52.555 6.615,52.6 7.8,52.6 35.864,52.611 60.036,52.661 44.55,52.73 54.823,52.773 45.9,52.855 87.272,52.847 80.475,53 77.575,53.025 62.825,53.05 18.625,53.1 15.925,53.125 32.677,53.148 50.025,53.13 58.363,53.138 37.462,53.213 88.15,53.225 89.36,53.225 34.991,53.484 60.909,53.534 0.81,53.6 2.045,53.6 3.28,53.6 4.515,53.6 39.879,53.746 51.375,53.79 63.698,53.923 44.55,53.965 59.236,54.011 31.803,54.022 36.589,54.086 42.525,54.1 45.9,54.09 47.975,54.105 56.171,54.121 29.275,54.25 53.35,54.25 91.47,54.275 92.705,54.275 93.94,54.275 95.175,54.275 66.625,54.3 34.117,54.358 50.025,54.365 27.638,54.375 24.363,54.4 26,54.4 61.783,54.408 68.262,54.425 69.9,54.45 71.537,54.45 64.572,54.797 30.93,54.895 60.109,54.884 35.716,54.959 51.375,55.025 38.531,55.094 44.55,55.2 33.244,55.231 62.656,55.281 45.9,55.325 41.177,55.448 57.519,55.469 50.025,55.6 54.698,55.598 65.445,55.67 80.475,55.675 77.575,55.7 60.983,55.758 18.625,55.775 30.057,55.768 15.925,55.8 34.842,55.833 47.975,55.957 32.371,56.104 63.529,56.154 52.085,56.26 37.183,56.442 44.55,56.435 50.287,56.462 24.376,56.478 45.9,56.56 29.184,56.641 61.856,56.631 25.605,56.725 26.84,56.725 28.075,56.725 33.969,56.706 66.5,56.75 67.735,56.75 68.97,56.75 70.205,56.75 71.44,56.75 39.829,56.796 58.867,56.817 56.046,56.946 31.497,56.978 42.6,57.1 52.959,57.134 51.16,57.335 62.729,57.504 33.096,57.579 44.55,57.67 45.9,57.795 47.975,57.81 30.624,57.851 35.625,58 53.832,58.007 38.425,58.15 52.034,58.209 63.603,58.228 64.85,58.253 57.394,58.294 25.98,58.35 27.215,58.35 28.45,58.35 32.222,58.453 68.175,58.525 41.275,58.625 66.224,58.674 29.751,58.724 54.705,58.88 44.55,58.905 45.9,59.03 52.907,59.082 31.349,59.326 14.053,59.397 67.097,59.547 69.073,59.598 28.878,59.672 70.3,59.725 25.575,59.75 26.715,59.75 27.95,59.75 43.775,59.75 55.578,59.753 53.78,59.955 40,59.975 45.455,60.045 81.997,60.172 30.476,60.199 13.18,60.27 15.252,60.323 42.902,60.623 56.452,60.627 54.653,60.828 44.582,60.918 67.134,60.913 82.87,61.045 29.703,61.097 80.798,61.123 12.307,61.143 14.378,61.197 24.77,61.2 26.105,61.2 27.34,61.2 28.575,61.2 68.769,61.194 69.9,61.2 71.135,61.2 72.37,61.2 38.9,61.375 42.028,61.497 57.325,61.5 55.527,61.702 43.709,61.791 83.743,61.918 81.672,61.997 11.434,62.016 13.505,62.07 58.2,62.275 41.155,62.37 56.4,62.575 42.835,62.665 84.616,62.791 10.685,62.815 82.545,62.87 12.632,62.943 40.282,63.243 58.2,63.51 41.962,63.538 85.315,63.565 56.8,63.735 83.418,63.743 10.725,64 39.409,64.116 12.3,64.195 41.089,64.411 58.2,64.745 85.25,64.75 56.8,64.82 83.825,64.945 38.95,65.07 10.725,65.235 40.375,65.27 12.3,65.43 56.8,65.955 58.2,65.98 85.25,65.985 38.95,66.13 83.825,66.18 40.375,66.33 10.425,66.4 12.375,66.565 85.55,67.15 56.8,67.19 58.2,67.215 48.575,67.25 9.552,67.273 38.95,67.365 11.625,67.375 83.825,67.415 40.375,67.49 19,67.725 28.275,67.725 68.25,67.725 77.525,67.725 0.785,67.9 2.02,67.9 3.255,67.9 4.49,67.9 5.725,67.9 86.423,68.023 84.55,68.125 8.678,68.147 10.752,68.248 56.8,68.425 58.2,68.45 90.21,68.5 91.445,68.5 92.68,68.5 93.915,68.5 95.15,68.5 38.95,68.6 40.375,68.725 6.59,68.875 7.825,68.875 87.297,68.897 85.423,68.973 9.878,69.122 88.225,69.55 89.46,69.55 56.8,69.66 58.2,69.685 38.95,69.835 86.297,69.847 40.375,69.96 9.005,69.995 6.775,70.375 8.01,70.375 87.17,70.72 56.8,70.895 58.2,70.92 88.04,71.025 89.275,71.025 38.95,71.07 40.375,71.195 0.835,71.375 2.07,71.375 3.305,71.375 4.54,71.375 91.42,72.025 92.655,72.025 93.89,72.025 95.125,72.025 56.8,72.13 58.2,72.155 38.95,72.305 40.375,72.43 56.8,73.365 58.2,73.39 40.375,73.515 38.95,73.54 58.2,74.625 19,74.675 28.275,74.675 68.25,74.675 77.525,74.675 38.95,74.775 40.3,74.925 41.4,75.235 55.725,75.235 37.875,75.26 59.275,75.26 41.4,76.47 55.725,76.47 37.875,76.495 59.275,76.495 41.4,77.705 55.725,77.705 37.875,77.73 59.275,77.73 41.4,78.94 55.725,78.94 37.875,78.965 59.275,78.965 41.4,80.175 55.725,80.175 37.875,80.2 59.275,80.2
NetC1_A_1: C1_A.1 SPDT_1.8 | length 1.6
  Top Layer w0.19: SPDT_1.8 24.775,60.475 C1_A.1
NetC1_A_2: C1_A.2 SP8T_1.4 | length 24.5
  Top Layer w0.19: C1_A.2 29.075,60.475 43.55,46 SP8T_1.4
NetC1_B_1: C1_B.1 SP8T_2.4 | length 25
  Bottom Layer w0.19: SP8T_2.4 51.989,43.45 68.075,59.536 C1_B.1
NetC1_B_2: C1_B.2 SPDT_8.5 | length 3.1
  Top Layer w1: 71.775,60.225 71.775,60.4
  Bottom Layer w0.19: C1_B.2@69.075,60.435 71.571,60.427
  Bottom Layer w0.9: 71.571,60.427 72.021,60.427
  other v1: 71.5,60.2 72.084,60.204 71.775,60.675
NetC1_C_1: ?.1@7.3,71.825 C1_C.1 D1_EN.3@9.775,71.825 RF1.1 | length 9.5
  Top Layer w0.19: RF1.1 5.862,69.622 ; C1_C.1 5.862,69.622 ; D1_EN.3@9.775,71.825 6.471,71.825 5.862,71.216 5.862,69.622
NetC1_C_2: C1_C.2 SPDT_1.3 | length 18.7
  Top Layer w0.19: C1_C.2 8.36,69.622 11.543,66.439 11.543,62.953 15.822,58.675 SPDT_1.3
NetC1_Vdd_2: "SP8T control.6" C1_Vdd.2 SP8T_1.11 | length 30.9
  Top Layer w0.3: 43.025,12.115 43.025,26.175 43.025,40.325 44.22,41.52 SP8T_1.11
NetC2_A_1: C2_A.1 SPDT_2.8 | length 1.6
  Top Layer w0.19: SPDT_2.8 24.775,51.475 C2_A.1
NetC2_A_2: C2_A.2 SP8T_1.6 | length 21.3
  Top Layer w0.19: C2_A.2 35.502,51.475 42.257,44.72 SP8T_1.6
NetC2_B_1: C2_B.1 SP8T_2.6 | length 21
  Bottom Layer w0.19: SP8T_2.6 53.506,42.17 62.786,51.45 C2_B.1
NetC2_B_2: C2_B.2 SPDT_7.5 | length 3.4
  Top Layer w1: 71.775,51.225 71.775,51.4
  Bottom Layer w0.19: C2_B.2 71.575,51.441
  Bottom Layer w0.9: 71.575,51.441 72.025,51.441
  other v1: 71.5,51.2 72.084,51.204 71.775,51.675
NetC2_C_1: ?.1@7.15,54.2 C2_C.1 D1_EN.3@9.65,54.15 RF2.1 | length 9.5
  Top Layer w0.19: RF2.1 5.841,51.872 ; C2_C.1 5.841,51.872 ; D1_EN.3@9.65,54.15 6.505,54.15 5.841,53.486 5.841,51.872
NetC2_C_2: C2_C.2 SPDT_2.3 | length 13.1
  Top Layer w0.19: C2_C.2 8.143,51.872 10.34,49.675 SPDT_2.3
NetC2_Vdd_1: "SP8T control.5" C2_Vdd.1 SP8T_2.11 | length 32
  Bottom Layer w0.3: SP8T_2.11 51.48,38.97 53.175,37.275 53.175,26.175 53.175,14.325 51.9,13.05 51.9,10.86 53.185,9.575
NetC3_A_1: C3_A.1 SPDT_3.8 | length 1.6
  Top Layer w0.19: SPDT_3.8 24.775,38.125 C3_A.1
NetC3_A_2: C3_A.2 SP8T_1.8 | length 20.7
  Top Layer w0.19: C3_A.2 36.765,38.125 42.08,43.44 SP8T_1.8
NetC3_B_1: C3_B.1 SP8T_2.8 | length 18.3
  Bottom Layer w0.19: SP8T_2.8 53.618,40.89 56.408,38.1 C3_B.1
NetC3_B_2: C3_B.2 SPDT_6.5 | length 3.4
  Top Layer w1: 71.775,37.875 71.775,38.05
  Bottom Layer w0.19: C3_B.2 71.575,38.091
  Bottom Layer w0.9: 71.575,38.091 72.025,38.091
  other v1: 71.5,37.85 72.084,37.854 71.775,38.325
NetC3_C_1: ?.1@7.05,31.65 C3_C.1 D1_EN.3@9.6,31.65 RF3.1 | length 9.7
  Top Layer w0.19: RF3.1 5.862,34.122 ; C3_C.1 5.862,34.122 ; D1_EN.3@9.6,31.65 6.352,31.65 5.862,32.14 5.862,34.122
NetC3_C_2: C3_C.2 SPDT_3.3 | length 13.1
  Top Layer w0.19: C3_C.2 8.081,34.122 10.284,36.325 SPDT_3.3
NetC4_A_1: C4_A.1 SPDT_4.8 | length 1.6
  Top Layer w0.19: SPDT_4.8 24.775,29.125 C4_A.1
NetC4_A_2: C4_A.2 SP8T_1.10 | length 23.9
  Top Layer w0.19: C4_A.2 30.821,29.125 43.856,42.16 SP8T_1.10
NetC4_B_1: C4_B.1 SP8T_2.10 | length 21.5
  Bottom Layer w0.19: SP8T_2.10 52.359,39.61 62.869,29.1 C4_B.1
NetC4_B_2: C4_B.2 SPDT_5.5 | length 3.4
  Top Layer w1: 71.775,28.875 71.775,29.05
  Bottom Layer w0.19: C4_B.2 71.575,29.091
  Bottom Layer w0.9: 71.575,29.091 72.025,29.091
  other v1: 71.5,28.85 72.084,28.854 71.775,29.325
NetC4_C_1: ?.1@6.9,18.6 C4_C.1 D1_EN.3@7.875,21.225 RF4.1 | length 10.2
  Top Layer w0.19: RF4.1 5.862,16.372 ; C4_C.1 5.862,16.372 ; D1_EN.3@7.875,21.225 7.875,18.982 7.493,18.6 6.9,18.6 6.309,18.6 5.862,18.153 5.862,16.372
NetC4_C_2: C4_C.2 SPDT_4.3 | length 18.7
  Top Layer w0.19: C4_C.2 8.277,16.372 11.565,19.659 11.565,23.059 15.83,27.325 SPDT_4.3
NetC5_A_1: C5_A.1 SP8T_1.15 | length 25.3
  Top Layer w0.19: SP8T_1.15 52.047,42.16 68.057,26.15 C5_A.1
NetC5_A_2: C5_A.2 SPDT_5.8 | length 1.6
  Top Layer w0.19: C5_A.2 71.275,26.15 SPDT_5.8
NetC5_B_1: C5_B.1 SPDT_4.5 | length 3.4
  Top Layer w1: 24.275,26.225 24.275,26.4
  Bottom Layer w0.19: 24.5,26.184 C5_B.1
  Bottom Layer w0.9: 24.05,26.184 24.5,26.184
  other v1: 24.275,25.95 23.966,26.421 24.55,26.425
NetC5_B_2: C5_B.2 SP8T_2.15 | length 22.6
  Bottom Layer w0.19: C5_B.2 30.238,26.175 43.673,39.61 SP8T_2.15
NetC5_C_1: C5_C.1 SPDT_5.3 | length 18.5
  Top Layer w0.19: SPDT_5.3 80.114,27.95 84.51,23.554 84.51,20.111 87.6,17.022 C5_C.1
NetC5_C_2: ?.1@88.975,19.125 C5_C.2 D1_EN.3@88.075,21.775 RF5.1 | length 10.1
  Top Layer w0.19: D1_EN.3@88.075,21.775 88.075,19.559 88.534,19.1 89.567,19.1 90.04,18.627 90.04,17.022 ; C5_C.2 90.04,17.022 ; RF5.1 90.04,17.022
NetC6_A_1: C6_A.1 SP8T_1.17 | length 22.1
  Top Layer w0.19: SP8T_1.17 53.693,43.44 61.983,35.15 C6_A.1
NetC6_A_2: C6_A.2 SPDT_6.8 | length 1.6
  Top Layer w0.19: C6_A.2 71.275,35.15 SPDT_6.8
NetC6_B_1: C6_B.1 SPDT_3.5 | length 3.4
  Top Layer w1: 24.3,35.225 24.3,35.4
  Bottom Layer w0.19: 24.5,35.184 C6_B.1
  Bottom Layer w0.9: 24.05,35.184 24.5,35.184
  other v1: 24.3,34.95 23.991,35.421 24.575,35.425
NetC6_B_2: C6_B.2 SP8T_2.17 | length 19.4
  Bottom Layer w0.19: C6_B.2 36.441,35.175 42.156,40.89 SP8T_2.17
NetC6_C_1: C6_C.1 SPDT_6.3 | length 12.8
  Top Layer w0.19: SPDT_6.3 85.639,36.95 87.842,34.747 C6_C.1
NetC6_C_2: ?.1@89.025,32.45 C6_C.2 D1_EN.3@86.675,32.45 RF6.1 | length 9.3
  Top Layer w0.19: D1_EN.3@86.675,32.45 89.641,32.45 90.083,32.893 90.083,34.704 ; C6_C.2 RF6.1
NetC7_A_1: C7_A.1 SP8T_1.19 | length 20.2
  Top Layer w0.19: SP8T_1.19 53.474,44.72 57.254,48.5 C7_A.1
NetC7_A_2: C7_A.2 SPDT_7.8 | length 1.6
  Top Layer w0.19: C7_A.2 71.275,48.5 SPDT_7.8
NetC7_B_1: C7_B.1 SPDT_2.5 | length 3.4
  Top Layer w1: 24.275,48.55 24.275,48.725
  Bottom Layer w0.19: 24.5,48.534 C7_B.1
  Bottom Layer w0.9: 24.05,48.534 24.5,48.534
  other v1: 24.275,48.275 23.966,48.746 24.55,48.75
NetC7_B_2: C7_B.2 SP8T_2.19 | length 19.6
  Bottom Layer w0.19: C7_B.2 35.741,48.525 42.096,42.17 SP8T_2.19
NetC7_C_1: C7_C.1 SPDT_7.3 | length 13
  Top Layer w0.19: SPDT_7.3 85.843,50.3 88.04,52.497 C7_C.1
NetC7_C_2: ?.1@89.025,54.6 C7_C.2 D1_EN.3@86.525,54.625 RF7.1 | length 9.2
  Top Layer w0.19: D1_EN.3@86.525,54.625 ?.1@89,54.625 ; ?.1@89.025,54.6 89.636,54.6 90.169,54.067 90.169,52.497 ; C7_C.2 90.169,52.497 ; RF7.1 90.169,52.497
NetC8_A_1: C8_A.1 SP8T_1.21 | length 23.4
  Top Layer w0.19: SP8T_1.21 52.301,46 63.801,57.5 C8_A.1
NetC8_A_2: C8_A.2 SPDT_8.8 | length 1.6
  Top Layer w0.19: C8_A.2 71.275,57.5 SPDT_8.8
NetC8_B_1: C8_B.1 SPDT_1.5 | length 3.4
  Top Layer w1: 24.275,57.575 24.275,57.75
  Bottom Layer w0.19: 24.5,57.534 C8_B.1
  Bottom Layer w0.9: 24.05,57.534 24.5,57.534
  other v1: 24.275,57.3 23.966,57.771 24.55,57.775
NetC8_B_2: C8_B.2 SP8T_2.21 | length 22.8
  Bottom Layer w0.19: C8_B.2 29.624,57.525 43.699,43.45 SP8T_2.21
NetC8_C_1: C8_C.1 SPDT_8.3 | length 18.4
  Top Layer w0.19: SPDT_8.3 80.018,59.3 84.532,63.814 84.532,67.042 87.762,70.272 C8_C.1
NetC8_C_2: ?.1@88.75,72.475 C8_C.2 D1_EN.3@86.25,72.5 RF8.1 | length 9.5
  Top Layer w0.19: D1_EN.3@86.25,72.5 ?.1@88.725,72.5 ; ?.1@88.75,72.475 89.427,72.475 89.997,71.905 89.997,70.272 ; C8_C.2 89.997,70.272 ; RF8.1 89.997,70.272
NetC_SP8T_1_1: C_SP8T_1.1 SP8T_1.1 | length 26.8
  Top Layer w0.19: C_SP8T_1.1 39.647,64.871 45.225,59.293 SP8T_1.1
NetC_SP8T_1_2: ?.1@41.625,74.225 C_SP8T_1.2 D1_EN.3@44.4,74.025 Tx.1 | length 9.1
  Top Layer w0.19: C_SP8T_1.2 Tx.1 ; 39.662,74.225 41.625,74.225 D1_EN.3@44.2,74.225
NetC_SP8T_2_1: ?.1@55.7,74.225 C_SP8T_2.1 D1_EN.3@52.975,74.025 Rx.1 | length 8.9
  Bottom Layer w0.19: D1_EN.3@53.175,74.225 55.7,74.225 57.457,74.225 ; C_SP8T_2.1@57.497,73.428 Rx.1
NetC_SP8T_2_2: C_SP8T_2.2 SP8T_2.1 | length 29.9
  Bottom Layer w0.19: SP8T_2.1 50.675,55.876 57.5,62.701 C_SP8T_2.2
NetD1_EN_3: "R1_EN 133K.2" "R1_EN 500.1" D1_EN.3@12.675,5.7 | length 4.3
  Top Layer w0.3: 9.725,4.3 9.725,5.7 D1_EN.3@12.675,5.7
NetD1_Vctl_3: "R1_Vctl 133K.2" "R1_Vctl 500.1" D1_Vctl.3 | length 4.4
  Bottom Layer w0.3: 9.725,4.3 9.725,5.7 D1_Vctl.3
NetD2_EN_3: "R2 EN 133K.2" "R2 EN 500.1" D2_EN.3 | length 4.3
  Top Layer w0.3: 17.25,4.3 17.25,5.7 D2_EN.3
NetD2_Vctl_3: "R2_Vctl 133K.2" "R2_Vctl 500.1" D2_Vctl.3 | length 4.4
  Bottom Layer w0.3: 17.25,4.3 17.25,5.7 D2_Vctl.3
NetD3_EN_3: "R3 EN 133K.2" "R3 EN 500.1" D3_EN.3 | length 4.3
  Top Layer w0.3: 24.775,4.3 24.775,5.7 D3_EN.3
NetD3_Vctl_3: "R3 Vctl 133K.2" "R3 Vctl 500.1" D3_Vctl.3 | length 4.3
  Bottom Layer w0.3: 24.775,4.3 24.775,5.7 D3_Vctl.3
NetD4_EN_3: "R4 EN 133K.2" "R4 EN 500.1" D4_EN.3 | length 3.7
  Top Layer w0.3: 24.9,11.1 26.375,11.1 D4_EN.3
NetD4_Vctl_3: "R4 Vctl 133K.2" "R4 Vctl 500.1" D4_Vctl.3 | length 3.7
  Bottom Layer w0.3: 24.9,11.1 26.375,11.1 D4_Vctl.3
NetD5_EN_3: "R5 EN 133K.1" "R5 EN 500.2" D5_EN.3 | length 3.8
  Top Layer w0.3: D5_EN.3 69.45,11.115 71.075,11.115
NetD5_Vctl_3: "R5 Vctl 133K.1" "R5 Vctl 500.2" D5_Vctl.3 | length 3.8
  Bottom Layer w0.3: D5_Vctl.3 69.45,11.1 71.075,11.1
NetD6_EN_3: "R6 EN 133K.1" "R6 EN 500.2" D6_EN.3 | length 4.4
  Top Layer w0.3: D6_EN.3 71.175,5.725 71.175,4.325
NetD6_Vctl_3: "R6 Vctl 133K.1" "R6 Vctl 500.2" D6_Vctl.3 | length 4.4
  Bottom Layer w0.3: D6_Vctl.3 71.175,5.725 71.175,4.325
NetD7_EN_3: "R7 EN 133K.1" "R7 EN 500.2" D7_EN.3 | length 4.2
  Top Layer w0.3: D7_EN.3 78.7,5.725 78.7,4.325
NetD7_Vctl_3: "R7 Vctl 133K.1" "R7 Vctl 500.2" D7_Vctl.3 | length 4.2
  Bottom Layer w0.3: D7_Vctl.3 78.7,5.725 78.7,4.325
NetD8_EN_3: "R8 1_EN 133K.1" "R8 EN 500.2" D8_EN.3 | length 4.2
  Top Layer w0.3: D8_EN.3 86.225,5.725 86.225,4.325
NetD8_Vctl_3: "R8 Vctl 133K.1" "R8 Vctl 500.2" D8_Vctl.3 | length 4.2
  Bottom Layer w0.3: D8_Vctl.3 86.225,5.725 86.225,4.325
"NetR1_EN 500_2": "R1_EN 500.2" "SPDT control 1.7" SPDT_1.4 | length 59.6
  Top Layer w0.3: 8.725,5.675 8.725,7.175 9.2,7.65 10.1,7.65 10.65,8.2 10.65,10.875 11.915,12.14 ; v1(18.7,58.025) SPDT_1.4
  Bottom Layer w0.3: 11.915,12.14 11.915,14.915 14.322,17.322 14.322,56.097 16.25,58.025 v1(18.7,58.025)
"NetR1_Vctl 500_2": "R1_Vctl 500.2" "SPDT control 1.2" SPDT_1.2 | length 61.9
  Top Layer w0.3: v1(18.7,59.325) SPDT_1.2
  Bottom Layer w0.3: 8.725,5.7 8.725,7.15 9.2,7.625 9.94,7.625 11.915,9.6 10.65,10.865 10.65,14.357 13.825,17.532 13.825,57.025 16.125,59.325 v1(18.7,59.325)
"NetR2 EN 500_2": "R2 EN 500.2" "SPDT control 1.8" SPDT_2.4 | length 48.1
  Top Layer w0.3: 14.455,12.14 15.725,10.87 15.725,8.025 16.25,7.5 16.25,5.7 ; v1(18.7,49.025) SPDT_2.4
  Bottom Layer w0.3: 14.455,12.14 14.455,15.505 15.781,16.831 15.781,17.646 15.731,17.696 15.731,47.956 16.8,49.025 v1(18.7,49.025)
"NetR2_Vctl 500_2": "R2_Vctl 500.2" "SPDT control 1.3" SPDT_2.2 | length 50.5
  Top Layer w0.3: v1(18.7,50.325) SPDT_2.2
  Bottom Layer w0.3: 16.25,5.7 16.25,6.575 14.455,8.37 14.455,9.6 13.2,10.855 13.2,14.957 14.99,16.747 15.033,16.747 15.328,17.042 15.328,17.458 15.278,17.508 15.278,48.853 16.75,50.325 v1(18.7,50.325)
"NetR3 EN 500_2": "R3 EN 500.2" "SPDT control 1.9" SPDT_3.4 | length 37.5
  Top Layer w0.3: 16.995,12.14 18.275,10.86 18.275,8.575 18.825,8.025 23.075,8.025 23.775,7.325 23.775,5.7 ; v1(18.7,35.675) SPDT_3.4
  Bottom Layer w0.3: 16.995,12.14 16.995,16.345 17.325,16.675 17.325,34.925 18.075,35.675 v1(18.7,35.675)
"NetR3 Vctl 500_2": "R3 Vctl 500.2" "SPDT control 1.4" SPDT_3.2 | length 40.5
  Top Layer w0.3: v1(18.7,36.975) SPDT_3.2
  Bottom Layer w0.3: v1(18.7,36.975) 18.175,36.975 16.825,35.625 16.825,16.882 15.75,15.807 15.75,10.845 16.995,9.6 16.995,8.53 17.5,8.025 23.075,8.025 23.775,7.325 23.775,5.7
"NetR4 EN 500_2": "R4 EN 500.2" "SPDT control 1.10" SPDT_4.4 | length 21.1
  Top Layer w0.3: v1(18.85,26.675) SPDT_4.4 ; 19.535,12.14 24.86,12.14
  Bottom Layer w0.3: v1(18.85,26.675) 18.85,25.6 19.535,24.915 19.535,12.14
"NetR4 Vctl 500_2": "R4 Vctl 500.2" "SPDT control 1.5" SPDT_4.2 | length 26.6
  Top Layer w0.3: v1(18.7,27.975) SPDT_4.2
  Bottom Layer w0.3: v1(18.7,27.975) 18.325,27.6 18.325,10.81 19.535,9.6 20.925,9.6 23.425,12.1 24.9,12.1
"NetR5 EN 500_1": "R5 EN 500.1" "SPDT control 2.7" SPDT_5.4 | length 27.9
  Top Layer w0.3: 71.075,12.115 74.51,12.115 75.75,10.875 77.775,10.875 79.015,12.115 ; SPDT_5.4 v1(77.375,28.6)
  Bottom Layer w0.3: v1(77.375,28.6) 78.125,28.6 79.1,27.625 79.1,16.35 ; 79.015,11.915 79.015,12.115 79.015,16.265
"NetR5 Vctl 500_1": "R5 Vctl 500.1" "SPDT control 2.2" SPDT_5.2 | length 27.6
  Top Layer w0.3: SPDT_5.2 v1(77.35,27.3)
  Bottom Layer w0.3: 71.075,12.1 74.55,12.1 75.81,10.84 77.75,10.84 ; v1(77.35,27.3) 77.7,27.3 78.6,26.4 78.6,17.075 77.75,16.225 77.75,10.84 ; 79.015,9.575 77.75,10.84
"NetR6 EN 500_1": "R6 EN 500.1" "SPDT control 2.8" SPDT_6.4 | length 43
  Top Layer w0.3: 72.175,5.725 72.175,6.65 73.225,7.7 79.175,7.7 80.3,8.825 80.3,10.86 81.555,12.115 ; SPDT_6.4 v1(77.375,37.6)
  Bottom Layer w0.3: v1(77.375,37.6) 78.85,37.6 80.6,35.85 80.6,16.8 81.555,15.845 81.555,12.115
"NetR6 Vctl 500_1": "R6 Vctl 500.1" "SPDT control 2.3" SPDT_6.2 | length 42.3
  Top Layer w0.3: SPDT_6.2 v1(77.35,36.3)
  Bottom Layer w0.3: 72.175,5.725 72.175,6.725 73.125,7.675 79.655,7.675 81.555,9.575 80.325,10.805 80.325,16.425 80.1,16.65 80.1,35.525 79.325,36.3 v1(77.35,36.3)
"NetR7 EN 500_1": "R7 EN 500.1" "SPDT control 2.9" SPDT_7.4 | length 53.4
  Top Layer w0.3: SPDT_7.4 v1(77.375,50.95) ; 79.7,5.725 79.7,6.75 80.6,7.65 81.65,7.65 82.825,8.825 82.825,10.845 84.095,12.115
  Bottom Layer w0.3: v1(77.375,50.95) 80.425,50.95 82.1,49.275 82.1,16.725 ; 82.1,16.714 84.095,14.719 84.095,12.115
"NetR7 Vctl 500_1": "R7 Vctl 500.1" "SPDT control 2.4" SPDT_7.2 | length 52.3
  Top Layer w0.3: SPDT_7.2 v1(77.35,49.65)
  Bottom Layer w0.3: v1(77.35,49.65) 80.375,49.65 81.6,48.425 81.6,16.5 ; 79.7,5.725 79.7,6.675 80.675,7.65 82.17,7.65 84.095,9.575 82.875,10.795 82.875,15.232 81.6,16.507
"NetR8 EN 500_1": "R8 EN 500.1" "SPDT control 2.10" SPDT_8.4 | length 62.2
  Top Layer w0.3: SPDT_8.4 v1(77.35,59.95) ; 86.635,12.115 88.15,10.6 88.15,8.825 87.225,7.9 87.225,5.725
  Bottom Layer w0.3: v1(77.35,59.95) 80.775,59.95 83.6,57.125 83.6,17.35 ; 83.6,17.332 86.635,14.297 86.635,12.115
"NetR8 Vctl 500_1": "R8 Vctl 500.1" "SPDT control 2.5" SPDT_8.2 | length 60.5
  Top Layer w0.3: SPDT_8.2 v1(77.35,58.65)
  Bottom Layer w0.3: v1(77.35,58.65) 81.35,58.65 83.1,56.9 83.1,17.125 85.375,14.85 85.375,10.835 86.635,9.575 87.225,8.985 87.225,5.725
NetSP8T_1_12: "SP8T control.7" SP8T_1.12 | length 28.9
  Top Layer w0.3: SP8T_1.12 45.225,26.35 45.565,26.01 45.565,12.115
NetSP8T_1_13: "SP8T control.9" SP8T_1.13 | length 28.8
  Top Layer w0.3: 50.675,12.115 SP8T_1.13
NetSP8T_1_14: "SP8T control.10" SP8T_1.14 | length 30.9
  Top Layer w0.3: SP8T_1.14 51.53,41.52 53.185,39.865 53.185,12.115
NetSP8T_2_12: "SP8T control.4" SP8T_2.12 | length 29.8
  Bottom Layer w0.3: 50.645,9.575 49.375,10.845 49.375,13.175 50.675,14.475 SP8T_2.12
NetSP8T_2_13: "SP8T control.3" SP8T_2.13 | length 29.9
  Bottom Layer w0.3: SP8T_2.13 45.225,16.125 46.85,14.5 46.85,10.83 48.105,9.575
NetSP8T_2_14: "SP8T control.2" SP8T_2.14 | length 31.2
  Bottom Layer w0.3: SP8T_2.14 44.42,38.97 43.75,38.3 43.75,14.35 44.3,13.8 44.3,10.84 45.565,9.575
VCC: "SPDT control 1.6" "SPDT control 2.6" CA1_Vdd.1 CA2_Vdd.1 CA3_Vdd.1 CA4_Vdd.1 CA5_Vdd.2 CA6_Vdd.2 CA7_Vdd.2 CA8_Vdd.2 D1_EN.1@11.725,3.45 D1_Vctl.1 D2_EN.1 D2_Vctl.1 D3_EN.1 D3_Vctl.1 D4_EN.1 D4_Vctl.1 D5_EN.2 D5_Vctl.2 D6_EN.2 D6_Vctl.2 D7_EN.2 D7_Vctl.2 D8_EN.2 D8_Vctl.2 SPDT_1.1 SPDT_2.1 SPDT_3.1 SPDT_4.1 SPDT_5.1 SPDT_6.1 SPDT_7.1 SPDT_8.1 | length 463.9
  Top Layer w0.3: 9.375,12.14 7.965,12.14 6.975,11.15 6.975,2.175 7.675,1.475 11.725,1.475 ; 9.715,12.14 v1(14.825,17.25) v1(16.325,17.25) v1(17.825,17.25) ; D1_EN.1@11.725,3.425 11.725,1.475 ; v1(18.7,28.625) SPDT_4.1 ; v1(18.7,37.625) SPDT_3.1 ; v1(18.7,50.975) SPDT_2.1 ; v1(18.7,59.975) SPDT_1.1 ; D2_EN.1@19.25,3.425 19.25,1.475 ; D3_EN.1@26.75,3.425 26.75,1.475 ; D4_EN.1 30.175,7.9 30.775,7.3 30.775,2.575 29.675,1.475 26.75,1.475 ; 65.275,8 D5_EN.2 ; 69.1,1.525 D6_EN.2 ; SPDT_5.1 v1(77.35,26.65) ; SPDT_6.1 v1(77.35,35.65) ; SPDT_7.1 v1(77.35,49) ; SPDT_8.1 v1(77.35,58) ; 76.8,1.525 D7_EN.2 ; v1(82.6,17.025) v1(81.1,17.025) v1(79.6,17.025) 76.475,13.9 76.475,12.115 75.265,13.325 67,13.325 65.275,11.6 65.275,2.55 66.3,1.525 83.625,1.525 84.325,2.225 D8_EN.2 ; 11.725,1.475 19.25,1.475 ; 19.25,1.475 26.75,1.475
  Bottom Layer w0.3: 13.625,1.5 D1_Vctl.1 ; v1(14.825,17.25) 14.825,49.775 16.025,50.975 v1(18.7,50.975) ; v1(16.325,17.25) 16.325,37.35 16.6,37.625 v1(18.7,37.625) ; v1(17.825,17.25) 17.825,27.807 v1@18.643,28.625 ; v1(18.7,59.975) 16.068,59.975 13.325,57.232 13.325,17.739 9.375,13.789 9.375,12.14 7.985,12.14 7,11.155 7,2.15 7.675,1.475 29.7,1.475 30.775,2.55 30.775,9.1 30.075,9.8 D4_Vctl.1 ; 21.15,1.5 D2_Vctl.1 ; 28.65,1.525 D3_Vctl.1 ; 65.3,9.9 D5_Vctl.2 ; 67.2,1.575 D6_Vctl.2 ; 74.9,1.55 D7_Vctl.2 ; v1(77.35,26.65) 77.35,26.3 76.475,25.425 76.475,12.115 75.24,13.35 67.05,13.35 65.275,11.575 65.275,2.55 66.3,1.525 81.8,1.525 82.425,2.15 D8_Vctl.2 ; v1(77.35,35.65) 79.25,35.65 79.6,35.3 v1(79.6,17.025) ; v1(77.35,49) 80.2,49 81.1,48.1 v1(81.1,17.025) ; v1(77.35,58) 80.875,58 82.6,56.275 v1(82.6,17.025)
pads on no net: RF1.4 RF1.5 RF2.4 RF2.5 RF3.4 RF3.5 RF4.4 RF4.5 RF5.4 RF5.5 RF6.4 RF6.5 RF7.4 RF7.5 RF8.4 RF8.5 Rx.4 Rx.5 SPDT_1.9 SPDT_2.9 SPDT_3.9 SPDT_4.9 SPDT_5.9 SPDT_6.9 SPDT_7.9 SPDT_8.9 Tx.4 Tx.5
copper on no net:
  other v1: 73.45,27.075 74.55,27.075 21.5,27.1 22.6,27.1 73.45,28.175 74.55,28.175 21.5,28.2 22.6,28.2 73.45,36.075 74.55,36.075 21.5,36.1 22.6,36.1 73.45,37.175 74.55,37.175 21.5,37.2 22.6,37.2 73.45,49.425 74.55,49.425 21.5,49.45 22.6,49.45 73.45,50.525 74.55,50.525 21.5,50.55 22.6,50.55 73.45,58.425 74.55,58.425 21.5,58.45 22.6,58.45 21.5,59.55 22.6,59.55 73.45,59.525 74.55,59.525

## Polygon pours and split planes (outlines as drawn)
GND on Top Layer "Top Layer-No Net" (solid, pour order 11): 0.5,80.5 0.5,0.5 95.5,0.5 95.5,80.5
GND on Bottom Layer "Top Layer-No Net" (solid, pour order 3): 95.5,80.5 95.5,0.5 0.5,0.5 0.5,80.5
GND on Signal Layer 1 "Internal Layer 1" (solid, pour order 6): 0.5,80.5 0.5,0.5 95.5,0.5 95.5,80.5
GND on Signal Layer 2 "Internal Layer 2" (solid, pour order 8): 0.5,80.5 0.5,0.5 95.5,0.5 95.5,80.5

## Keep-outs
Keep-Out Layer:
  lines w0.2: 95.85,0.125 95.875,0.15 ; 0.125,0.125 0.125,0.125
  lines w0.3: 0,0 96,0 96,81 0,81 0,0

## Silkscreen, mask and mechanical layers (free items; w line width, h text height)
Top Overlay:
  text "Designed by Robert Brandt" at 11.85,78.675 h0.85
  text "Vdd" at 8.075,13.775 h0.75
  text "Vdd" at 41.775,13.775 h0.75
  text "E1" at 11.375,13.75 h0.75
  text "E2" at 13.925,13.75 h0.75
  text "E3" at 16.375,13.75 h0.75
  text "E4" at 18.925,13.75 h0.75
  text "C1" at 45.075,13.75 h0.75
  text "GND" at 47.125,13.75 h0.75
  text "B1" at 50.075,13.75 h0.75
  text "A1" at 52.625,13.75 h0.75
  text "Vdd" at 75.2,13.75 h0.75
  text "E5" at 78.5,13.725 h0.75
  text "E6" at 81.05,13.725 h0.75
  text "E7" at 83.5,13.725 h0.75
  text "E8" at 86.05,13.725 h0.75
  text "GND" at 8.325,7.25 h0.75
  text "GND" at 42.025,7.25 h0.75
  text "V1" at 11.4,7.225 h0.75
  text "V2" at 13.95,7.225 h0.75
  text "V3" at 16.4,7.225 h0.75
  text "V4" at 18.95,7.225 h0.75
  text "A2" at 45.1,7.225 h0.75
  text "B2" at 47.65,7.225 h0.75
  text "C2" at 50.1,7.225 h0.75
  text "Vdd" at 52.475,7.225 h0.75
  text "GND" at 75.45,7.225 h0.75
  text "V5" at 78.525,7.2 h0.75
  text "V6" at 81.075,7.2 h0.75
  text "V7" at 83.525,7.2 h0.75
  text "V8" at 86.075,7.2 h0.75
Mechanical 16:
  drawing of 1873 lines, arcs and shapes, not listed
  text "1" at -29.286,135.509 h1.78
  text "2" at 43.358,135.509 h1.78
  text "3" at 116.51,135.509 h1.78
  text "4" at 189.408,135.509 h1.78
  text "A" at -63.627,112.497 h1.78
  text "A" at 223.393,112.497 h1.78
  text "B" at -63.627,64.44 h1.78
  text "B" at 223.393,64.44 h1.78
  text "C" at -63.627,15.926 h1.78
  text "C" at 223.393,15.926 h1.78
  text "ENGINEER:" at 108.458,-21.082 h1.14
  text "TITLE:" at 146.558,-21.082 h1.14
  text "PCB DESIGNER:" at 108.458,-28.575 h1.14
  text "D" at -63.627,-32.08 h1.78
  text "DATE:" at 108.458,-36.322 h1.14
  text "PART NO.:" at 146.558,-36.322 h1.14
  text "REV:" at 199.898,-36.322 h1.14
  text "Altium Limited" at 75.438,-38.862 h1.78
  text ".PRINT_DATE" at 109.728,-39.37 h1.78
  text "12a Rodborough Rd" at 75.438,-41.402 h1.78
  text "Frenchs Forest" at 75.438,-43.942 h1.78
  text "FILE NAME:" at 108.458,-43.942 h1.14
  text "DWG NO:" at 146.558,-43.942 h1.14
  text "SCALE:" at 199.898,-43.942 h1.14
  text "NSW 2086" at 75.438,-46.482 h1.78
  text ".PCB_FILE_NAME_NO_PATH" at 109.728,-46.99 h1.78
  text "1" at -29.286,-52.451 h1.78
  text "2" at 43.358,-52.451 h1.78
  text "3" at 116.51,-52.451 h1.78
  text "4" at 189.408,-52.451 h1.78

## Text inside footprints (layer, text, board x,y; h text height)
"SP8T control": Top Overlay "1" at 40.485,9.067 h1.27; Top Overlay "5" at 54.709,9.067 h1.27; Top Overlay "10" at 54.709,11.607 h1.27; Top Overlay "6" at 40.485,11.607 h1.27
"SPDT control 1": Top Overlay "1" at 6.835,9.092 h1.27; Top Overlay "5" at 21.059,9.092 h1.27; Top Overlay "10" at 21.059,11.632 h1.27; Top Overlay "6" at 6.835,11.632 h1.27
"SPDT control 2": Top Overlay "1" at 73.935,9.067 h1.27; Top Overlay "5" at 88.159,9.067 h1.27; Top Overlay "10" at 88.159,11.607 h1.27; Top Overlay "6" at 73.935,11.607 h1.27